# Altium PCB Atlas_Sensor_Board_RevA.pcbdoc
Units mm, origin at the board's own origin, x right, y up, seen from the top; angles counter-clockwise.
Board outline 80 x 80 mm, 2 copper layers (Top Layer, Bottom Layer); 6 components, 8 nets, 36 pads, 6 vias.
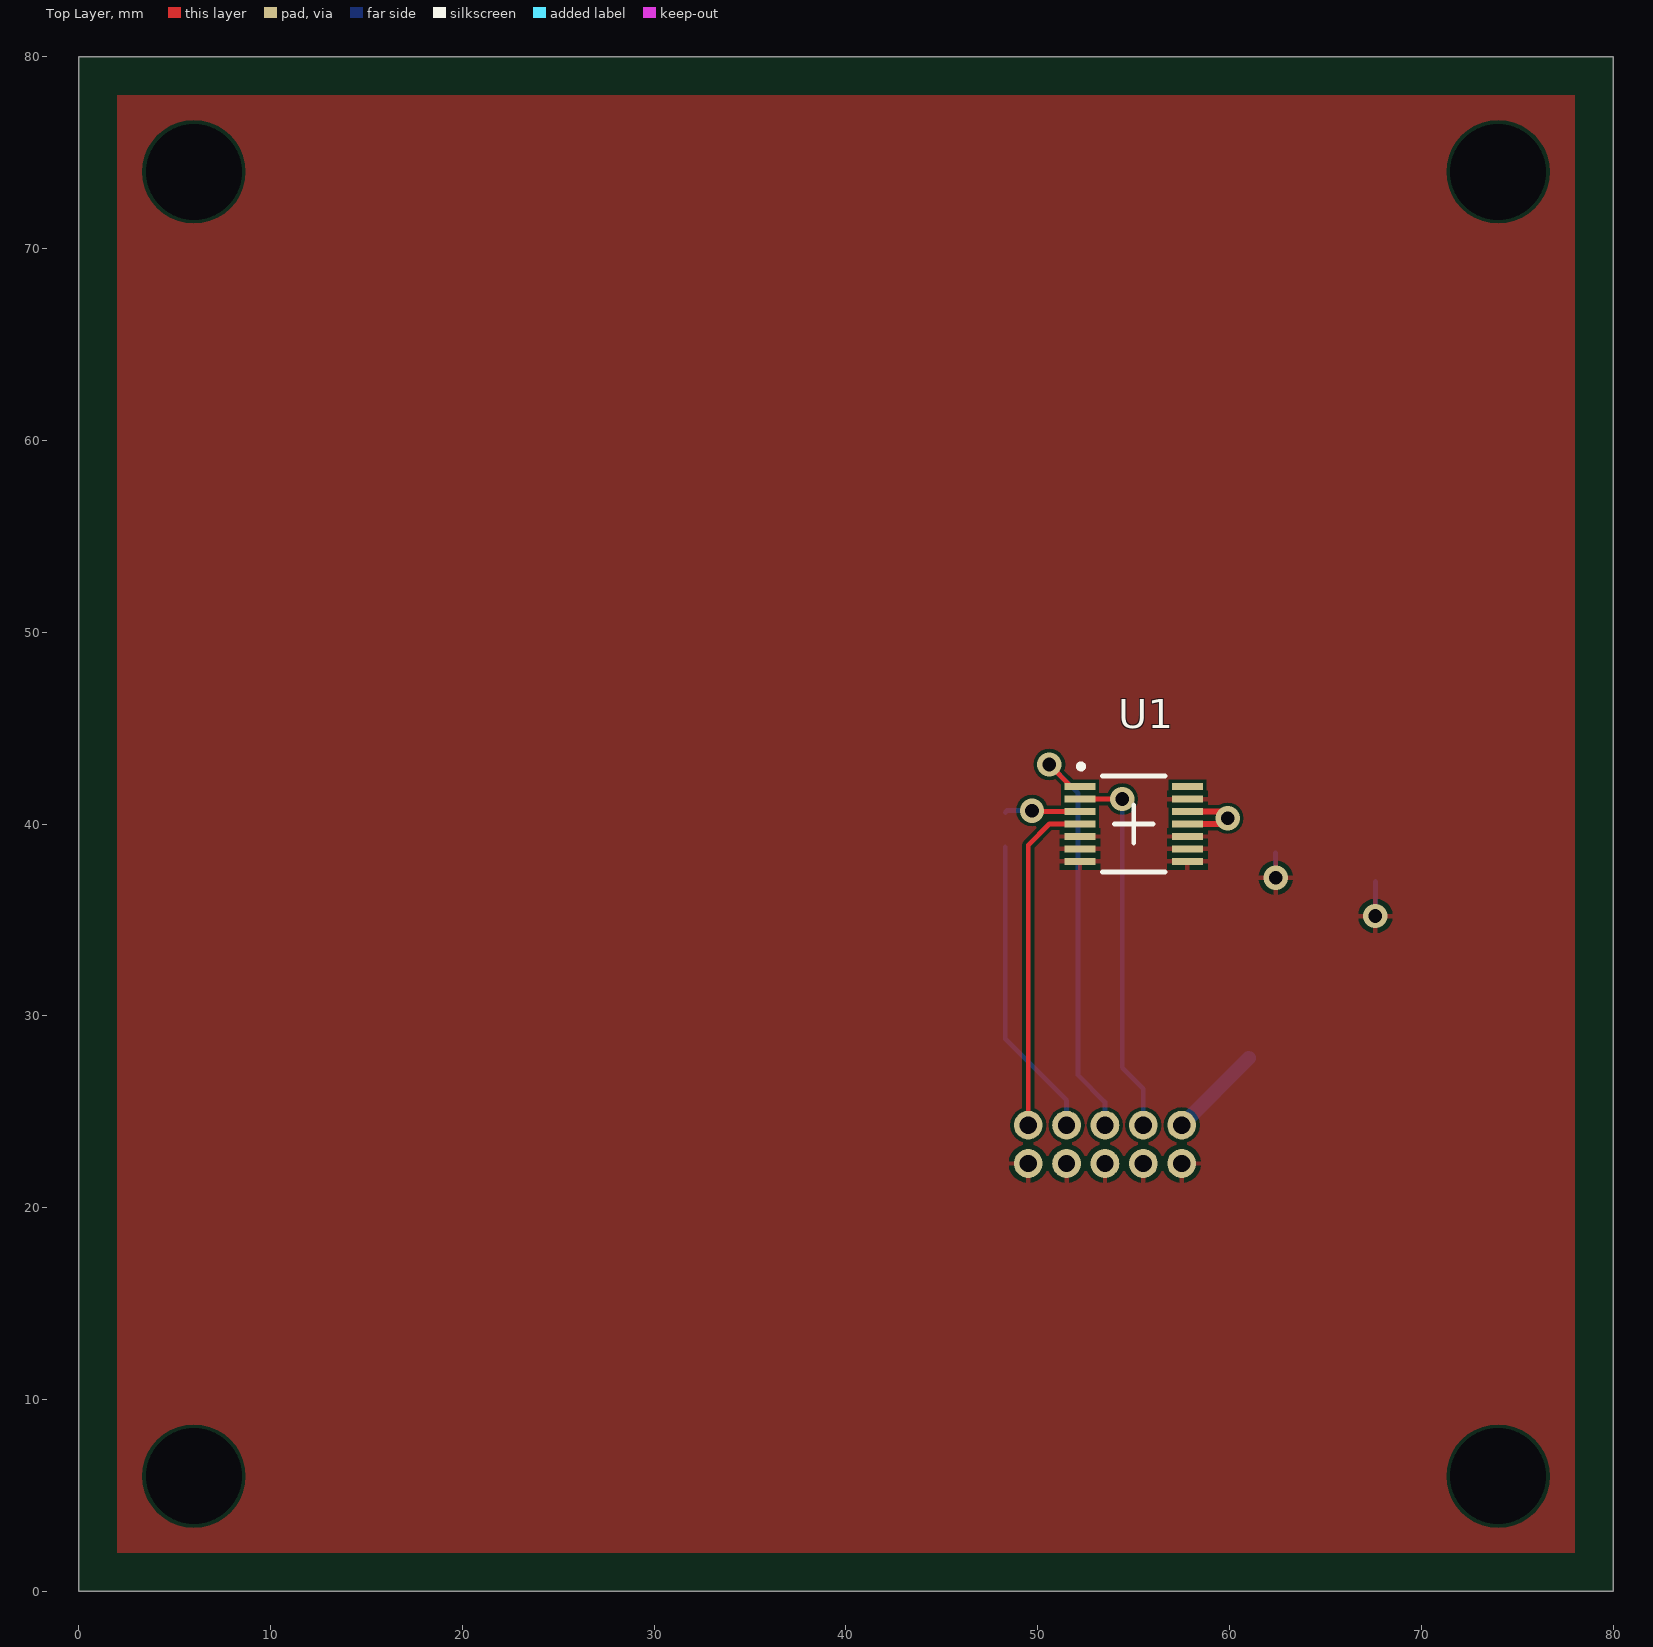
[diagram p0: Top Layer view]
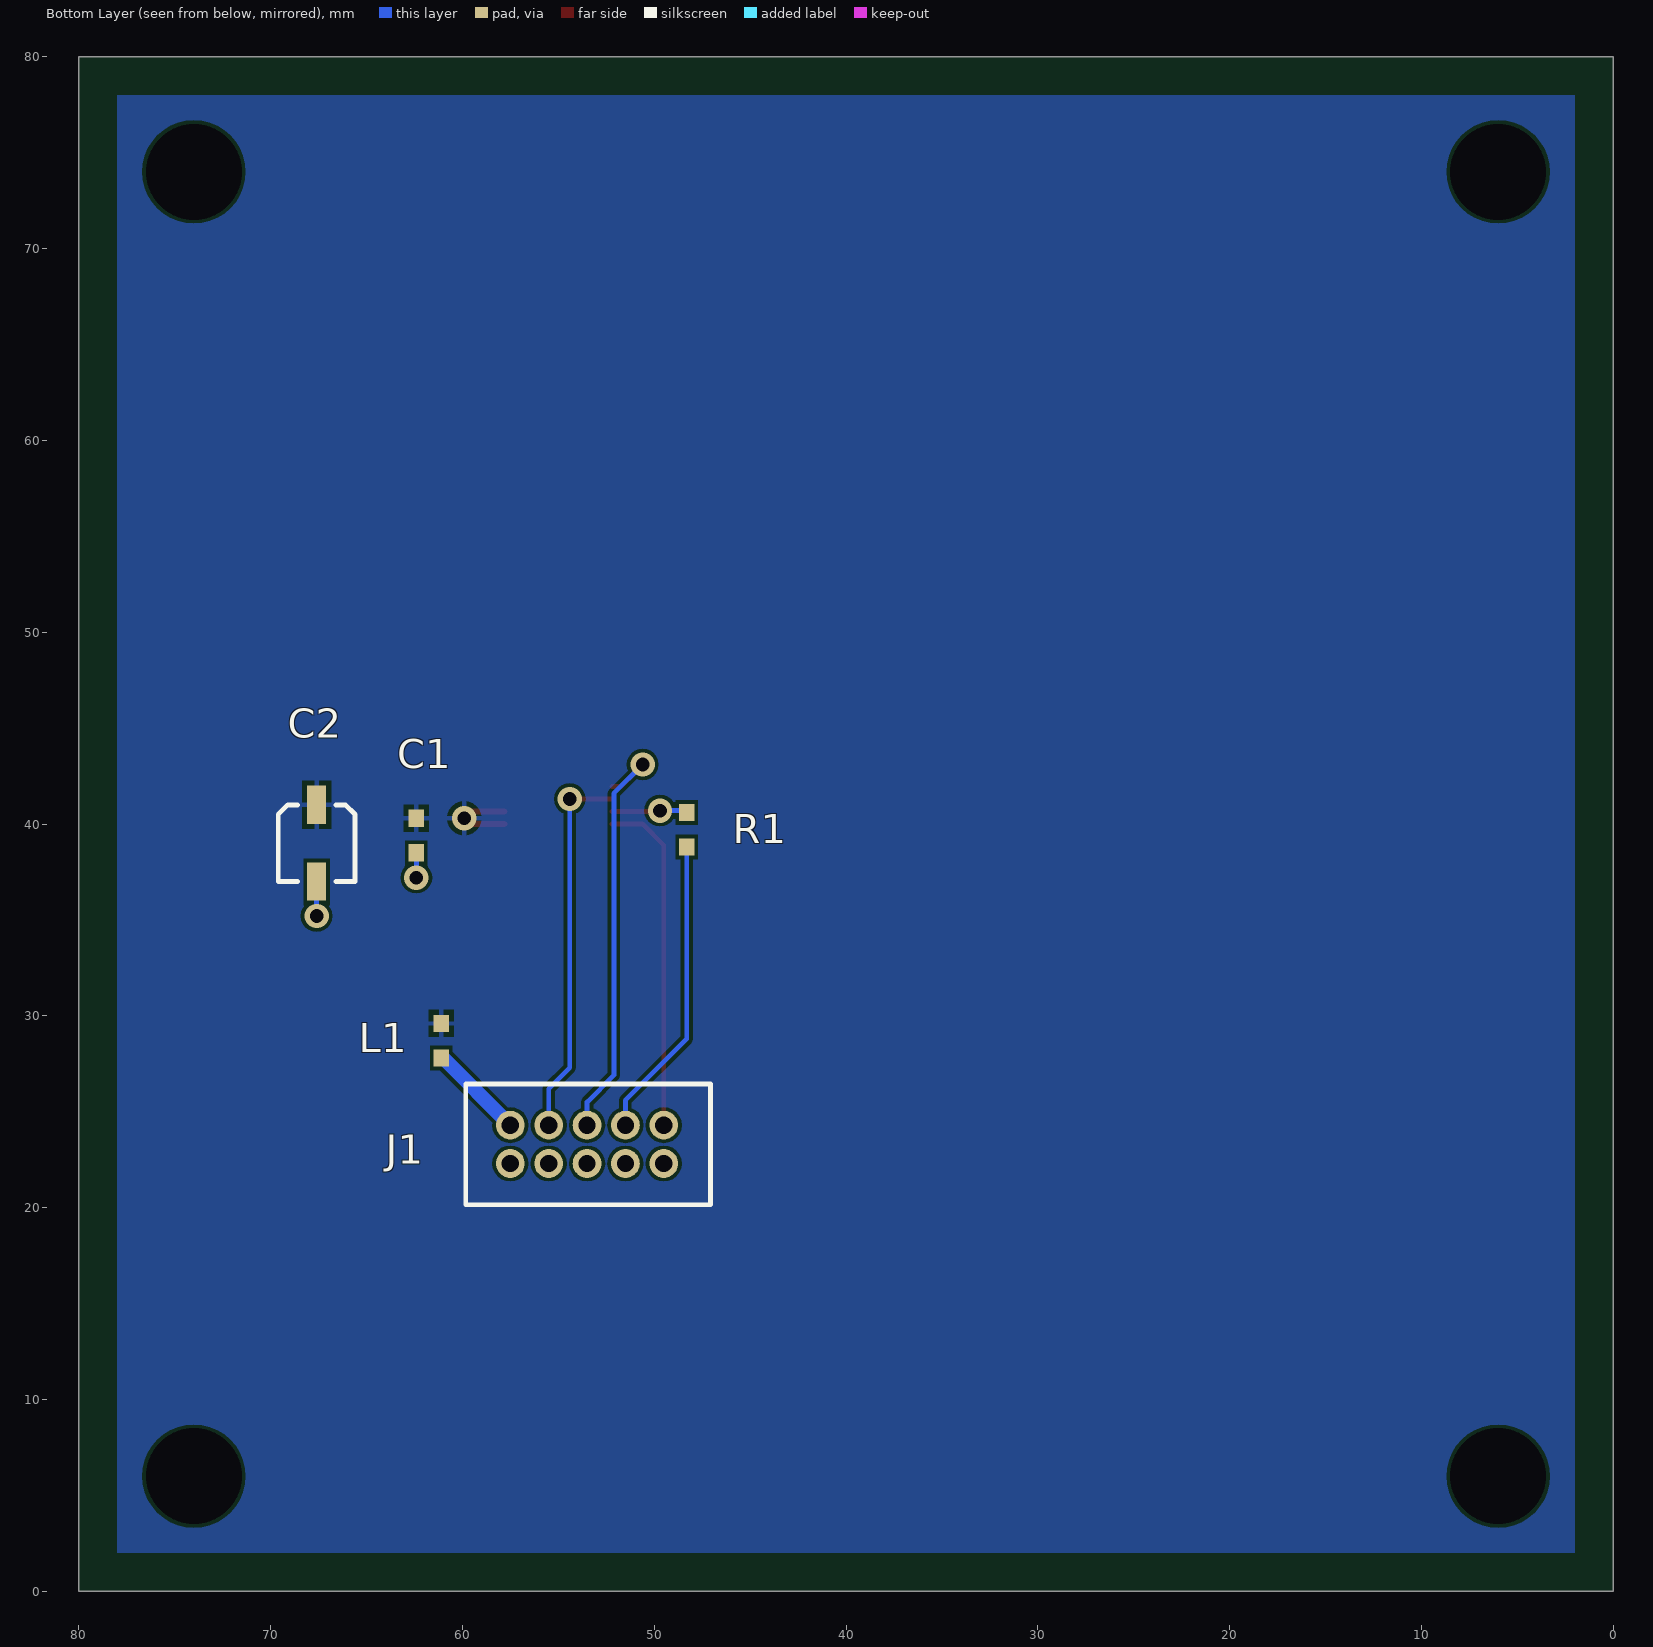
[diagram p1: Bottom Layer view, seen from below]
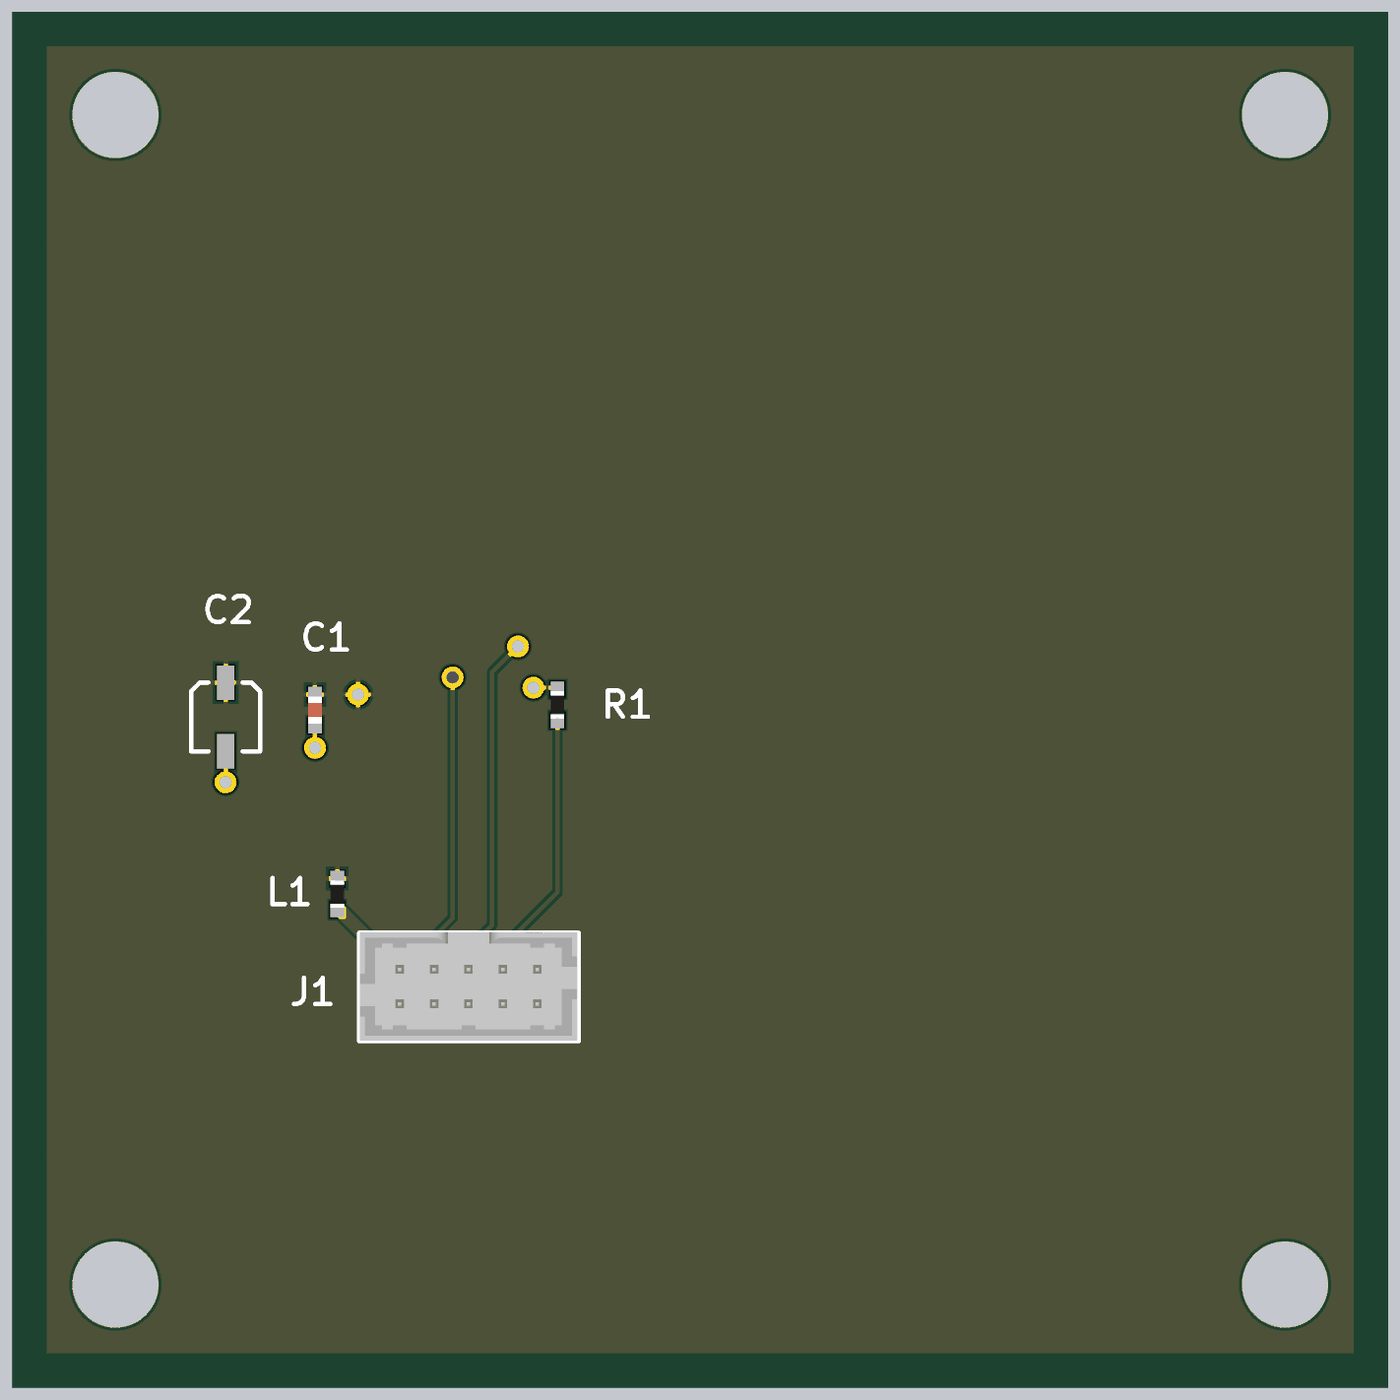
[diagram p2: 3D render of the assembled board from below, using the file's embedded part models]

## Layer stack, top to bottom
Top Solder: solder mask 0.0102, Solder Resist, Dk 3.5
Top Layer: signal copper 0.0356
Dielectric 1: dielectric 0.32, FR-4, Dk 4.8
Bottom Layer: signal copper 0.0356
Bottom Solder: solder mask 0.0102, Solder Resist, Dk 3.5

## Board outline
0,0 80,0 80,80 0,80

## Design rules (kind name [scope] priority, off if disabled: settings)
Clearance [All] p1: gap=0.178
PolygonConnect [All] p1: connectstyle=Relief reliefconductorwidth=0.254 reliefentries=4 polygonreliefangle="90 Angle" airgapwidth=0.254
RoutingVias [All] p1: holewidth=0.711 width=1.27 viastyle="Through Hole" minholewidth=0.711 minwidth=1.27 maxholewidth=0.711 maxwidth=1.27
SolderMaskExpansion [All] p1: expansion=0.102
Width [All] p1: maxlimit=2.54 minlimit=0.254 preferedwidth=0.254 minimp=50.000000 maximp=50.000000 favimp=50.000000
30 further rules are at their usual default settings.

## Components (designator, comment, footprint, x,y, rotation, side; value= is the part's Value field where it differs from the comment)
C1 "0.1uF" CAP0603W 62.4,39.4 r270 bottom
C2 "10u" "SMD Elec Cap (5.8_5.8_4)" 67.6,39 r180 bottom
J1 "87831-1010" MOLEX_87831-1010 53.5,23.3 r0 bottom
L1 "Ferrite Bead" RES0603W 61.1,28.7 r270 bottom
R1 "100R" RES0603W 48.3,39.7 r90 bottom
U1 "AS5048A" TSSOP14 55,40 r0 top

## Footprints (in the part's own frame and the unit in brackets; to place one, negate y for a bottom-side part, rotate by r counter-clockwise, add the part's x,y. Pads: shape width x height; smd on the part's side, far side on the other; paste and mask are expansions set on the pad)
CAP0603W [mm] "capacitor 0603 wave soldering"
  rect 0.9x0.8 smd: 1(-0.9,0) 2(0.9,0)
  body extent -0.8,-0.4 0.8,0.4, height 0.3
MOLEX_87831-1010 [mm] "Boardmount Receptacle for 2x5 IDC Header"
  round 1.5 hole 0.9: 1(-4,-1) 2(-2,-1) 3(0,-1) 4(2,-1) 5(4,-1) 6(4,1) 7(2,1) 8(0,1) 9(-2,1) 10(-4,1)
  silkscreen extent -6.43,-3.15 6.32,3.15, body extent -6.35,-3.18 6.3,3.12, height 6.5
RES0603W [mm] "resistor 0603 wave soldering"
  rect 0.9x0.8 smd: 1(-0.9,0) 2(0.9,0)
  body extent -0.8,-0.4 0.8,0.4, height 0.45
"SMD Elec Cap (5.8_5.8_4)" [mm] "L=5.8mm, H=5.8mm, D=4mm"
  rect 1x2 smd mask+0.102: 1(0,-2) 2(0,2)
  silkscreen extent -2,-2 2,2, body extent -2,-2 2,2, height 5.51
TSSOP14 [mm] "0.65mm Pitch"
  rect 1.6x0.35 smd mask+0.102: 1(-2.8,1.95) 2(-2.8,1.3) 3(-2.8,0.65) 4(-2.8,0) 5(-2.8,-0.65) 6(-2.8,-1.3) 7(-2.8,-1.95) 8(2.8,-1.95) 9(2.8,-1.3) 10(2.8,-0.65) 11(2.8,0) 12(2.8,0.65) 13(2.8,1.3) 14(2.8,1.95)
  silkscreen extent -2.88,-2.5 1.63,3.13, body extent -3.2,-2.5 3.2,2.5, height 1.1

## Part data
C2: library part "10uF 16v"
J1: library part "2x5 IDC/Ribbon Header", "2x5 IDC Header"
L1: "EMI Suppression/Ferrite Bead"
R1: library part "100R (0603)"
U1: "14bit Rotational Hall Effect Sensor"

## Free pads (board coordinates)
  oval 0.8x1.3 hole 5: 0(6,6) 0(74,74) 3(6,74)
  rect 0.9x0.8 hole 5: 0(74,6)

## Via types
v1: diameter 1.27, hole 0.711, Top Layer to Bottom Layer, 6 vias

## Nets (pads, with @x,y where several pads share a name; then routed paths per layer and width w, separated by ;. In a path a pad name is that pad's centre, name@x,y a point inside that pad or via, vN(x,y) a via of type N, cw(c..) or ccw(c..) an arc to the next point about the centre after c; other vN are vias at no path point)
3.3V: C1.1 C2.2 L1.1 U1.11 U1.12 | length 4.5
  Top Layer w0.3: U1.11 59.6,40 v1(59.9,40.3) 59.55,40.65 U1.12
C\S\: J1.3 U1.1 | length 22.1
  Top Layer w0.254: v1(50.6,43.1) 51.75,41.95 U1.1
  Bottom Layer w0.254: v1(50.6,43.1) 52.1,41.6 52.1,26.9 53.5,25.5 J1.3
GND: C1.2 C2.1 J1.6 J1.7 J1.8 J1.9 J1.10 U1.5 U1.6 U1.7 U1.8 U1.9 U1.10 U1.13 | length 3.2
  Top Layer w0.254: v1(62.4,37.2) v1@62.5,37.1
  Bottom Layer w0.254: v1(62.4,37.2) C1.2 ; v1(67.6,35.2) C2.1
MISO: J1.2 R1.1 | length 15.8
  Bottom Layer w0.254: R1.1 48.3,28.8 51.5,25.6 J1.2
MOSI: J1.1 U1.4 | length 17.8
  Top Layer w0.254: J1.1 49.5,38.9 50.6,40 U1.4
NetJ1_5: J1.5 L1.2 | length 4.9
  Bottom Layer w0.75: J1.5 L1.2@61,27.8
NetR1_2: R1.2 U1.3 | length 4
  Top Layer w0.254: v1(49.7,40.7) 49.75,40.65 U1.3
  Bottom Layer w0.254: R1.2 48.4,40.7 v1(49.7,40.7)
SCK: J1.4 U1.2 | length 19.7
  Top Layer w0.254: U1.2 v1(54.4,41.3)
  Bottom Layer w0.254: v1(54.4,41.3) 54.4,27.3 55.5,26.2 J1.4
pads on no net: U1.14

## Polygon pours and split planes (outlines as drawn)
GND on Top Layer "Bottom Layer-No Net" (solid, pour order 4): 78,78 2,78 2,2 78,2
3.3V on Bottom Layer "Bottom Layer-No Net" (solid, pour order 6): 78,2 2,2 2,78 78,78

## Silkscreen, mask and mechanical layers (free items; w line width, h text height)
Top Overlay:
  lines w0.254: 54,40 56,40 ; 55,39 55,41
Mechanical 1:
  the board outline again, w0.254